# EAGLE board BasePlate (EAGLE 7.6.0)

Size 292.16 x 120 mm. Coordinates in mm from the lower left corner, seen from the top.
Outline: 53.08,120 113.08,120 arc-90 118.08,115 118.08,54 arc90 123.08,49 171.08,49 arc90 176.08,54 176.08,115 arc-90 181.08,120 239.08,120 arc-90 292.08,60 arc-90 239.08,0 53.08,0 arc-90 0.08,60 arc-90 53.08,120
Outline: 56.08,79 68.08,79 arc-90 70.08,77 70.08,43 arc-90 68.08,41 56.08,41 arc90 54.08,39 54.08,37 arc-90 52.08,35 16.08,35 arc-90 14.08,37 14.08,39 arc90 12.08,41 11.08,41 arc-90 9.08,43 9.08,77 arc-90 11.08,79 12.08,79 arc90 14.08,81 14.08,85 arc-90 16.08,87 52.08,87 arc-90 54.08,85 54.08,81 arc90 56.08,79
Outline: 236.08,41 223.08,41 arc-90 221.08,43 221.08,77 arc-90 223.08,79 236.08,79 arc90 238.08,81 238.08,83 arc-90 240.08,85 276.08,85 arc-90 278.08,83 278.08,81 arc90 280.08,79 281.08,79 arc-90 283.08,77 283.08,43 arc-90 281.08,41 280.08,41 arc90 278.08,39 278.08,35 arc-90 276.08,33 240.08,33 arc-90 238.08,35 238.08,39 arc90 236.08,41
Copper layers (1*16): Top 0.035mm / dielectric 1.5mm / Bottom 0.035mm
Design rules "default": minimum track width 10mil, minimum drill 24mil, track to track 8mil, track to pad 8mil, pad to pad 8mil, via to via 8mil, smd to smd 8mil, copper to edge 40mil, drill to drill 8mil, minimum pad ring 10mil, minimum via ring 8mil, stop-mask expansion 4mil, vias tented up to drill 0mil, thermal gap 10mil

## Footprints (pad centres in the part's own frame; a part is rotated, then mirrored left to right if it is on the bottom)
GIMBAL_FOOTPRINT_SCREWS = hole 2.8: -23.5,22.95; -23.5,-22.95; 23.5,-22.95; 23.5,22.95
FRSKY-TARANIS-GIMBAL = hole 2.8: -27,27; -27,-27; 27,-27; 27,27
SPARKFUN_LCD_33 = hole 2.8: 77.5,2.5; 77.5,33.5; 2.5,2.5; 2.5,33.5
CONTROLLER_OUTLINE = hole 2.8: -64.5,-52.5; 64.5,-52.5; 64.5,52.5; -64.5,52.5
ATMEGA128RFA1 = drill 1.016 pad 1.88: 3.3V 26.67,2.54; 3.3V1 24.13,2.54; A0 39.37,2.54; A1 41.91,2.54; A2 44.45,2.54; A3 46.99,2.54; A4 49.53,2.54; A5 52.07,2.54; A6 54.61,2.54; A7 54.61,5.08; AREF 12.446,50.8; CLKI 32.766,45.72; GND 29.21,2.54; GND1 31.75,2.54; GND2 14.986,50.8; J2.D3 44.45,50.8; J2.D5 39.37,50.8; J2.D6 36.83,50.8; J2.D9 27.686,50.8; J2.D10 25.146,50.8; J2.D11 22.606,50.8; J2.IOREF 19.05,2.54; J2.NC 16.51,2.54; MISO 20.066,50.8; PB5 30.226,50.8; PD4 25.146,45.72; PD5 22.606,45.72; PD6 20.066,45.72; PD7 17.526,45.72; PE2 46.99,50.8; PE4 41.91,50.8; PE7 34.29,50.8; PG1 49.403,45.72; PG2 46.863,45.72; PG5 44.323,45.72; RESET 21.59,2.54; RX0 52.07,50.8; RX1 30.226,45.72; SCK 17.526,50.8; SCL 7.366,50.8; SDA 9.906,50.8; TST 35.306,45.72; TX0 49.53,50.8; TX1 27.686,45.72; VCC 34.29,2.54 | drill 1.016 pad 1.88 square: PG0 51.943,45.72

## Placement (x,y rotation side)
E$1  [GIMBAL_FOOTPRINT_SCREWS]  34.08,60 0 top
E$2  [GIMBAL_FOOTPRINT_SCREWS]  258.08,60 180 top
E$3  [FRSKY-TARANIS-GIMBAL]  38.08,60 0 top
E$4  [FRSKY-TARANIS-GIMBAL]  254.08,60 180 top
E$5  [SPARKFUN_LCD_33]  106.08,7 0 top
E$6  [CONTROLLER_OUTLINE]  146.08,60 0 top
E$7  [ATMEGA128RFA1]  120.58,118.5 270 top

## Library data of the parts
E$1-E$6 = RemotePartsA
E$7 = BOBs